# EAGLE board v2 (EAGLE 9.2.0)
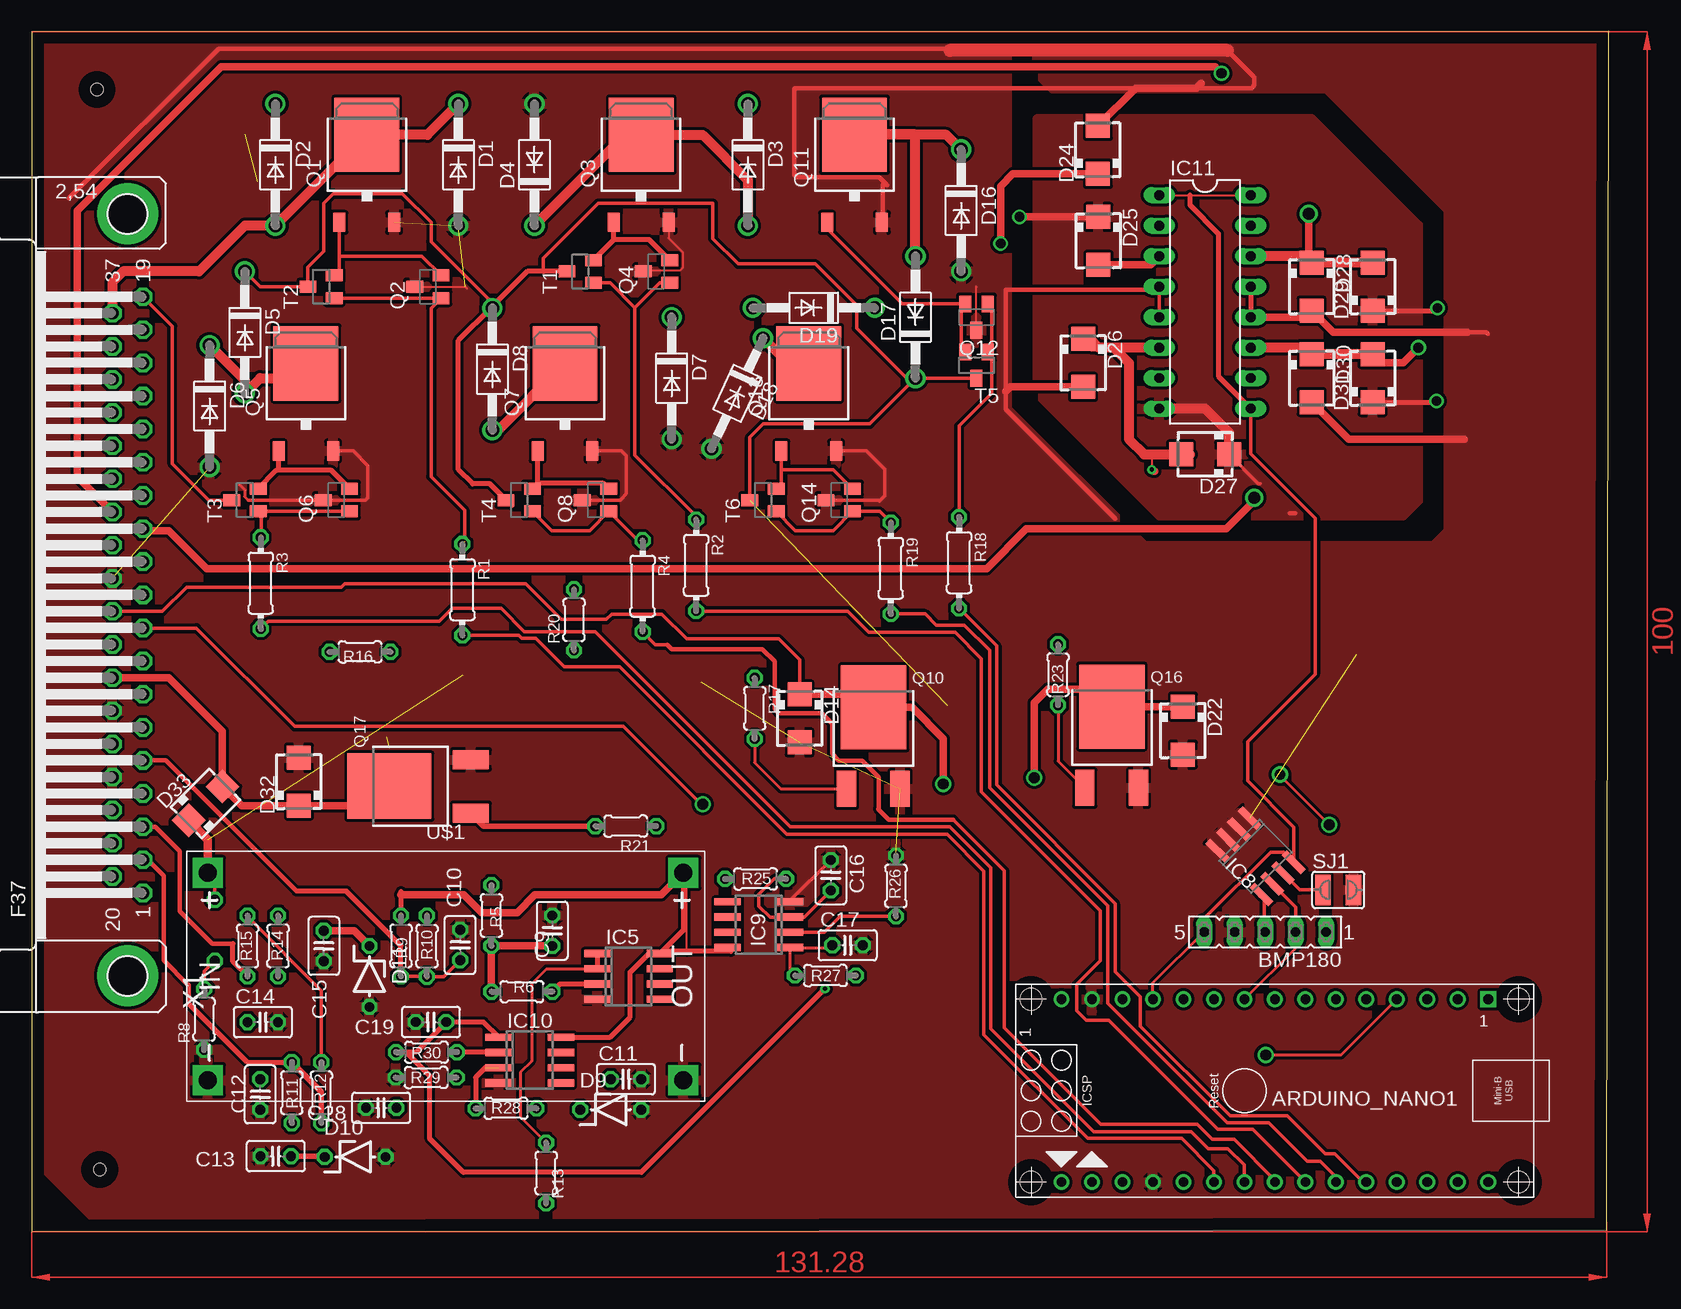
[diagram p0: board, top side]
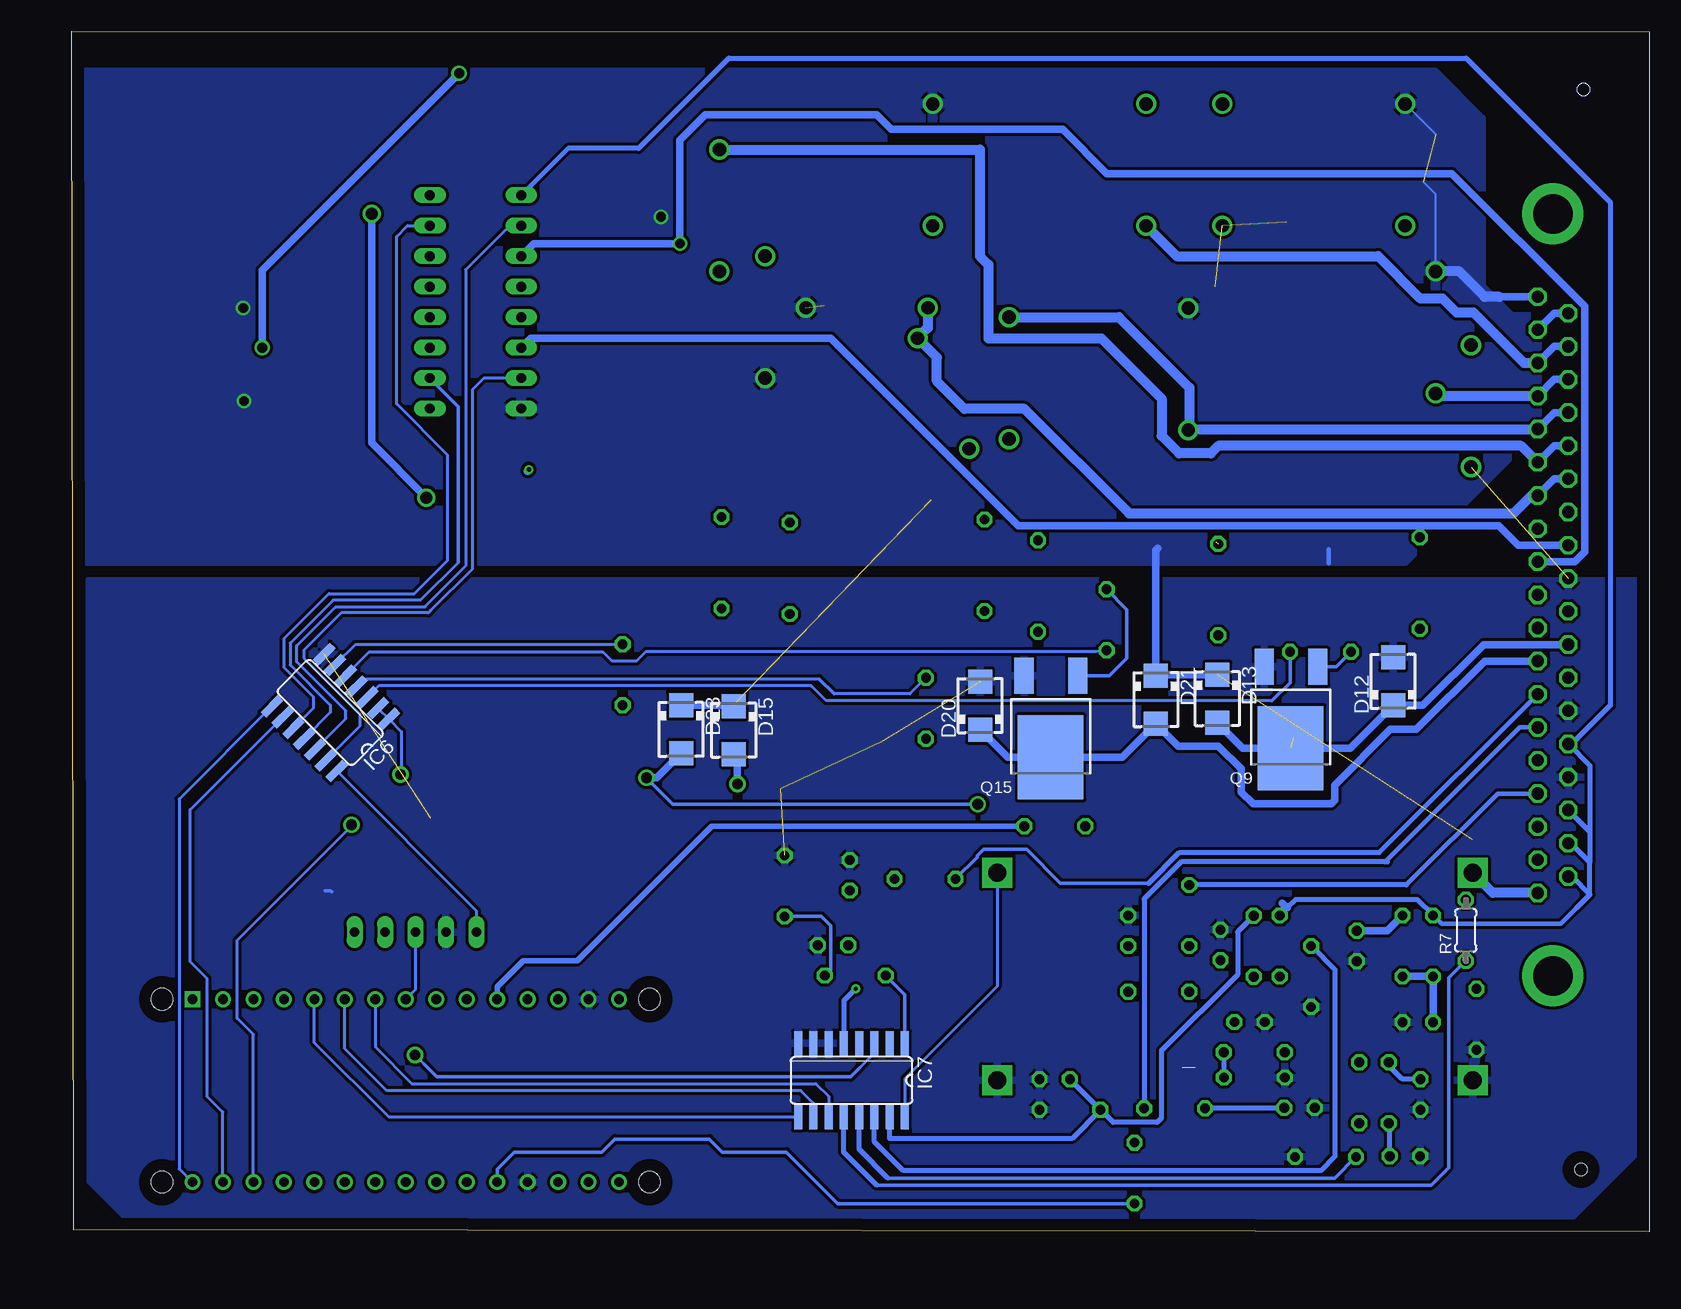
[diagram p1: board, bottom side, seen from below]

Size 131.45 x 100.02 mm. Coordinates in mm from the lower left corner, seen from the top.
Outline: 0,0 131.27,0.16 131.45,100.02 0,100 0,0
Copper layers (1*16): Top 0.035mm / dielectric 1.5mm / Bottom 0.035mm
Design rules "default *": minimum track width 6mil, minimum drill 0.35mm, track to track 10mil, track to pad 10mil, pad to pad 10mil, via to via 10mil, smd to smd 10mil, copper to edge 40mil, drill to drill 6mil, minimum pad ring 10mil, minimum via ring 8mil, stop-mask expansion 4mil, vias tented up to drill 0mil, thermal gap 10mil
Holes 1.02 mm at 5.47,95.16 5.68,5.16

## Footprints (pad centres in the part's own frame; a part is rotated, then mirrored left to right if it is on the bottom)
ARDUINO_NANO = drill 0.8 square: 1 -20.32,-7.62 | drill 0.8: 2 -17.78,-7.62; 3 -15.24,-7.62; 4 -12.7,-7.62; 5 -10.16,-7.62; 6 -7.62,-7.62; 7 -5.08,-7.62; 8 -2.54,-7.62; 9 0,-7.62; 10 2.54,-7.62; 11 5.08,-7.62; 12 7.62,-7.62; 13 10.16,-7.62; 14 12.7,-7.62; 15 15.24,-7.62; 16 15.24,7.62; 17 12.7,7.62; 18 10.16,7.62; 19 7.62,7.62; 20 5.08,7.62; 21 2.54,7.62; 22 0,7.62; 23 -2.54,7.62; 24 -5.08,7.62; 25 -7.62,7.62; 26 -10.16,7.62; 27 -12.7,7.62; 28 -15.24,7.62; 29 -17.78,7.62; 30 -20.32,7.62 | hole 1.778: -22.86,-7.62; -22.86,7.62; 17.78,7.62; 17.78,-7.62
FE05-1 = drill 0.813 long: 1 -5.08,0; 2 -2.54,0; 3 0,0; 4 2.54,0; 5 5.08,0
C025-025X050 = drill 0.813 octagon: 1 -1.27,0; 2 1.27,0
DO41-10 = drill 1.118: A 5.08,0; C -5.08,0
ZDIO-5 = drill 0.813 octagon: A 2.54,0; C -2.54,0
SMA = smd 2 x 2: A 2,0; C -2,0
SO08 = smd 0.6 x 2.2: 1 -1.905,-2.6; 2 -0.635,-2.6; 3 0.635,-2.6; 4 1.905,-2.6; 5 1.905,2.6; 6 0.635,2.6; 7 -0.635,2.6; 8 -1.905,2.6
SO14 = smd 0.66 x 2.032: 1 -3.81,-3.073; 2 -2.54,-3.073; 3 -1.27,-3.073; 4 0,-3.073; 5 1.27,-3.073; 6 2.54,-3.073; 7 3.81,-3.073; 8 3.81,3.073; 9 2.54,3.073; 10 1.27,3.073; 11 0,3.073; 12 -1.27,3.073; 13 -2.54,3.073; 14 -3.81,3.073
SO16 = smd 0.66 x 2.032: 1 -4.445,-3.073; 2 -3.175,-3.073; 3 -1.905,-3.073; 4 -0.635,-3.073; 5 0.635,-3.073; 6 1.905,-3.073; 7 3.175,-3.073; 8 4.445,-3.073; 9 4.445,3.073; 10 3.175,3.073; 11 1.905,3.073; 12 0.635,3.073; 13 -0.635,3.073; 14 -1.905,3.073; 15 -3.175,3.073; 16 -4.445,3.073
SO-08 = smd 0.6 x 2.2: 1 -1.905,-2.6; 2 -0.635,-2.6; 3 0.635,-2.6; 4 1.905,-2.6; 5 1.905,2.6; 6 0.635,2.6; 7 -0.635,2.6; 8 -1.905,2.6
DIL16 = drill 0.813 long: 1 -8.89,-3.81; 2 -6.35,-3.81; 3 -3.81,-3.81; 4 -1.27,-3.81; 5 1.27,-3.81; 6 3.81,-3.81; 7 6.35,-3.81; 8 8.89,-3.81; 9 8.89,3.81; 10 6.35,3.81; 11 3.81,3.81; 12 1.27,3.81; 13 -1.27,3.81; 14 -3.81,3.81; 15 -6.35,3.81; 16 -8.89,3.81
TO252 = smd 1 x 1.6: 1 -2.28,-4.8; 3 2.28,-4.8 | smd 5.4 x 6.2: 2 0,2.5
SOT23-BEC = smd 1 x 1.4: B -0.95,-1.1; C 0,1.1; E 0.95,-1.1
DPAK = smd 1.6 x 2.997: 1 -2.261,-4.928; 3 2.21,-4.928 | smd 5.452 x 7: 4 0,1.853
0204/7 = drill 0.813 octagon: 1 -3.81,0; 2 3.81,0
0204/5 = drill 0.813 octagon: 1 -2.54,0; 2 2.54,0
SJW = smd 1.27 x 2.54: 1 -1.27,0; 2 1.27,0
SOT23 = smd 1 x 1.4: 1 -0.95,-1.1; 2 0.95,-1.1; 3 0,1.1
DC-DC-STEP-DOWN-LM2596 = drill 1.5 pad 2.5 square: IN+ -19.812,8.636; IN- -19.812,-8.636; OUT+ 19.812,8.636; OUT- 19.812,-8.636
F37HP = drill 1.016 octagon: 1 -24.841,-1.27; 2 -22.073,-1.27; 3 -19.329,-1.27; 4 -16.561,-1.27; 5 -13.792,-1.27; 6 -11.049,-1.27; 7 -8.28,-1.27; 8 -5.512,-1.27; 9 -2.769,-1.27; 10 0,-1.27; 11 2.769,-1.27; 12 5.512,-1.27; 13 8.28,-1.27; 14 11.049,-1.27; 15 13.818,-1.27; 16 16.561,-1.27; 17 19.329,-1.27; 18 22.098,-1.27; 19 24.841,-1.27; 20 -23.47,1.27; 21 -20.701,1.27; 22 -17.932,1.27; 23 -15.189,1.27; 24 -12.421,1.27; 25 -9.652,1.27; 26 -6.909,1.27; 27 -4.14,1.27; 28 -1.372,1.27; 29 1.372,1.27; 30 4.14,1.27; 31 6.909,1.27; 32 9.677,1.27; 33 12.421,1.27; 34 15.189,1.27; 35 17.958,1.27; 36 20.701,1.27; 37 23.47,1.27 | drill 3.302 pad 5.08: G1 -31.75,0; G2 31.75,0

## Placement (x,y rotation side)
ARDUINO_NANO1  [ARDUINO_NANO]  101.07,11.74 180 top
BMP180  [FE05-1]  102.8,24.96 180 top
C9  [C025-025X050]  43.4,25.07 90 top
C10  0.001uF  [C025-025X050]  35.71,23.89 90 top
C11  [C025-025X050]  49.53,12.7 0 top
C12  0.001uf  [C025-025X050]  19.05,11.43 270 top
C13  0.1uf  [C025-025X050]  20.35,6.28 180 top
C14  0.001uf  [C025-025X050]  19.27,17.45 0 top
C15  0.1uf  [C025-025X050]  24.35,23.8 270 top
C16  0.001uf  [C025-025X050]  66.61,29.69 90 top
C17  0.22uf  [C025-025X050]  68,23.86 0 top
C18  0.001uf  [C025-025X050]  29.13,10.31 180 top
C19  0.22uf  [C025-025X050]  33.28,17.46 180 top
D1  1N4004  [DO41-10]  35.56,88.9 270 top
D2  1N4004  [DO41-10]  20.32,88.9 270 top
D3  1N4004  [DO41-10]  59.69,88.9 270 top
D4  1N4004  [DO41-10]  41.91,88.9 90 top
D5  1N4004  [DO41-10]  17.78,74.93 270 top
D6  1N4004  [DO41-10]  14.83,68.79 270 top
D7  1N4004  [DO41-10]  53.34,71.12 270 top
D8  1N4004  [DO41-10]  38.4,71.87 270 top
D9  5.1v  [ZDIO-5]  48.26,10.16 0 top
D10  5.1v  [ZDIO-5]  26.96,6.22 0 top
D11  5.1v  [ZDIO-5]  28.16,21.26 270 top
D12  S1M  [SMA]  21.34,45.85 90 bottom
D13  S1M  [SMA]  35.98,44.4 270 bottom
D14  S1M  [SMA]  64,42.76 270 top
D15  S1M  [SMA]  76.27,41.79 270 bottom
D16  1N4004  [DO41-10]  77.47,85.09 270 top
D17  1N4004  [DO41-10]  73.66,76.2 90 top
D18  1N4004  [DO41-10]  58.81,69.84 245 top
D19  1N4004  [DO41-10]  65.18,76.98 180 top
D20  S1M  [SMA]  55.75,43.83 90 bottom
D21  S1M  [SMA]  41.09,44.33 270 bottom
D22  S1M  [SMA]  95.94,41.75 270 top
D23  S1M  [SMA]  80.67,41.84 270 bottom
D24  S1M  [SMA]  88.86,90.14 90 top
D25  S1M  [SMA]  88.9,82.55 270 top
D26  S1M  [SMA]  87.63,72.39 270 top
D27  S1M  [SMA]  97.79,64.77 180 top
D28  S1M  [SMA]  106.68,78.74 270 top
D29  S1M  [SMA]  111.76,78.74 90 top
D30  S1M  [SMA]  106.68,71.12 270 top
D31  S1M  [SMA]  111.76,71.12 90 top
D32  S1M  [SMA]  22.27,37.5 90 top
D33  S1M  [SMA]  14.5,35.67 45 top
IC5  LM358D  [SO08]  49.75,21.26 270 top
IC6  74HC164D  [SO14]  109.89,43.25 135 bottom
IC7  4051D  [SO16]  66.46,12.6 180 bottom
IC8  24AA08SN  [SO-08]  102,31.27 225 top
IC9  LM358D  [SO08]  60.6,25.57 90 top
IC10  LM358D  [SO08]  41.52,14.29 270 top
IC11  L293D  [DIL16]  97.79,77.47 270 top
Q1  Aod442  [TO252]  27.94,88.9 0 top
Q2  BC858ASMD  [SOT23-BEC]  33.02,78.74 90 top
Q3  Aod442  [TO252]  50.8,88.9 0 top
Q4  BC858ASMD  [SOT23-BEC]  52.07,80.01 90 top
Q5  Aod442  [TO252]  22.86,69.85 0 top
Q6  BC858ASMD  [SOT23-BEC]  25.4,60.96 90 top
Q7  Aod442  [TO252]  44.45,69.85 0 top
Q8  BC858ASMD  [SOT23-BEC]  46.99,60.96 90 top
Q9  MJD122  [DPAK]  29.86,42.13 180 bottom
Q10  MJD122  [DPAK]  70.17,41.82 0 top
Q11  Aod442  [TO252]  68.58,88.9 0 top
Q12  BC858ASMD  [SOT23-BEC]  78.74,76.2 180 top
Q13  Aod442  [TO252]  64.77,69.85 0 top
Q14  BC858ASMD  [SOT23-BEC]  67.31,60.96 90 top
Q15  MJD122  [DPAK]  49.87,41.37 180 bottom
Q16  MJD122  [DPAK]  90.03,41.9 0 top
Q17  MJD122  [DPAK]  31.67,37.12 90 top
R1  [0204/7]  35.91,53.49 270 top
R2  [0204/7]  55.38,55.52 270 top
R3  [0204/7]  19.1,54.04 270 top
R4  [0204/7]  50.92,53.79 270 top
R5  2k  [0204/5]  38.32,26.34 270 top
R6  1.5k  [0204/5]  40.86,19.99 0 top
R7  15k  [0204/5]  15.27,25.1 90 bottom
R8  5k  [0204/5]  14.38,17.69 90 top
R9  [0204/5]  32.95,23.78 270 top
R10  [0204/5]  30.78,23.8 270 top
R11  2.2k  [0204/5]  21.68,11.57 270 top
R12  3k  [0204/5]  24.15,11.57 90 top
R13  1.5k  [0204/5]  42.88,4.87 270 top
R14  2.2k  [0204/5]  20.54,23.8 90 top
R15  3k  [0204/5]  18,23.8 90 top
R16  1k  [0204/5]  27.38,48.31 180 top
R17  1k  [0204/5]  60.26,43.6 270 top
R18  [0204/7]  77.29,55.74 270 top
R19  [0204/7]  71.6,55.27 270 top
R20  1k  [0204/5]  45.2,50.98 90 top
R21  1k  [0204/5]  49.52,33.78 180 top
R23  1k  [0204/5]  85.54,46.4 270 top
R25  2k  [0204/5]  60.34,29.39 0 top
R26  1k  [0204/5]  72.04,28.8 90 top
R27  1.5k  [0204/5]  66.15,21.33 180 top
R28  2k  [0204/5]  39.54,10.27 180 top
R29  1k  [0204/5]  32.89,12.83 180 top
R30  1.5k  [0204/5]  32.91,14.94 180 top
SJ1  [SJW]  108.9,28.47 0 top
T1  BC848  [SOT23]  45.72,80.01 90 top
T2  BC848  [SOT23]  24.13,78.74 90 top
T3  BC848  [SOT23]  17.78,60.96 90 top
T4  BC848  [SOT23]  40.64,60.96 90 top
T5  BC848  [SOT23]  78.74,72.2 180 top
T6  BC848  [SOT23]  60.96,60.96 90 top
U$1  DC-DC-STEP-DOWN-LM2596  [DC-DC-STEP-DOWN-LM2596]  34.51,21.26 0 top
X1  [F37HP]  8.01,53.06 90 top

## Library data of the parts
ARDUINO_NANO1 = ArduinoNanoV30
BMP180 = con-lsta; OC_FARNELL: unknown; OC_NEWARK: unknown
C9-C19 = rcl; SPICEPREFIX: C
D1-D33 = diode
IC5 IC9 IC10 = linear
IC6 = 74xx-us
IC7 = 40xx
IC8 = microchip; MF: MICROCHIP; MPN: 24AA08-I/SN; OC_FARNELL: 1579568; OC_NEWARK: 92C6826
IC11 = st-microelectronics
Q1 Q3 Q5 Q7 Q11 Q13 = IGBT
Q2 Q4 Q6 Q8 Q12 Q14 = transistor-pnp
Q9 Q10 Q15-Q17 = MJD122; AVAILABILITY: Unavailable; MF: STMicroelectronics; MP: MJD122; PACKAGE: None; PRICE: None
R1-R21 R23 R25-R30 = rcl; SPICEPREFIX: R
SJ1 = jumper
T1-T6 = transistor
U$1 = diy-modules
X1 = con-subd; OC_FARNELL: unknown; OC_NEWARK: unknown

## Nets
5V: ARDUINO_NANO1.12 BMP180.5 IC5.8 IC6.14 IC7.16 IC8.8 IC9.8 IC10.8 IC11.1 IC11.9 IC11.16 R10.1 R12.2 R15.2 U$1.OUT+ X1.20 X1.21 X1.22 X1.24
A: ARDUINO_NANO1.7 IC7.11
A0: ARDUINO_NANO1.4 IC7.3
ACC: D2.C D3.C D5.C D8.C D13.C D15.C D17.C D19.C D21.C D23.C D25.C D27.C D29.C D31.C D33.C IC11.8 R7.2 T1.3 T2.3 T3.3 T4.3 T5.3 T6.3 U$1.IN+ X1.1 X1.19
AIRIN: C10.1 R9.2 R10.2 X1.5
AIROUT: C11.1 D9.C IC7.15 R9.1
B: ARDUINO_NANO1.6 IC7.10
C: ARDUINO_NANO1.5 IC7.9
CKPIN: R5.1 X1.4
CKPOUT: ARDUINO_NANO1.20 R13.2
CLK1: ARDUINO_NANO1.30 IC6.8
CLR1: ARDUINO_NANO1.29 IC6.9
CPKOUT: IC5.1 IC5.2 R13.1
DATA: ARDUINO_NANO1.28 IC6.1 IC6.2
ECN1: D16.C D17.A Q11.2 X1.14 X1.33
ECN1L: ARDUINO_NANO1.26 R18.2
ECN2: D18.C D19.A Q13.2 X1.13 X1.32
ECN2L: ARDUINO_NANO1.25 R19.2
GND: ARDUINO_NANO1.14 ARDUINO_NANO1.19 BMP180.4 C9.2 C10.2 C11.2 C12.2 C13.2 C14.2 C15.2 C16.2 C17.2 C18.2 C19.2 D1.A D4.A D6.A D7.A D9.A D10.A D11.A D12.A D14.A D16.A D18.A D20.A D22.A D24.A D26.A D28.A D30.A D32.A IC5.4 IC6.7 IC7.6 IC7.7 IC7.8 IC8.1 IC8.2 IC8.3 IC8.4 IC9.4 IC10.4 IC11.4 IC11.5 IC11.12 IC11.13 Q1.3 Q2.C Q3.3 Q4.C Q5.3 Q6.C Q7.3 Q8.C Q9.3 Q10.3 Q11.3 Q12.C Q13.3 Q14.C Q15.3 Q16.3 Q17.3 R8.1 R26.2 R29.2 SJ1.2 U$1.IN- U$1.OUT- X1.23 X1.25 X1.29
IAC_A: D24.C D25.A IC11.3 X1.11
IAC_B: D26.C D27.A IC11.6 X1.30
IAC_C: D28.C D29.A IC11.14 X1.12
IAC_D: D30.C D31.A IC11.11 X1.31
IAC_LA: IC6.12 IC11.2
IAC_LB: IC6.13 IC11.7
IAC_LC: IC6.10 IC11.15
IAC_LD: IC6.11 IC11.10
INY1: D1.C D2.A Q1.2 X1.18 X1.37
INY2: D3.A D4.C Q3.2 X1.17 X1.36
INY3: D5.A D6.C Q5.2 X1.16 X1.35
INY4: D7.C D8.A Q7.2 X1.15 X1.34
INYL1A: ARDUINO_NANO1.21 R1.2
INYL2A: ARDUINO_NANO1.24 R2.2
INYL3A: ARDUINO_NANO1.22 R3.2
INYL4A: ARDUINO_NANO1.23 R4.2
LAMB0: R25.1 X1.7
LAMB0OUT: C17.1 IC7.1 IC9.1 R27.2
LAMB1: R28.1 X1.6
LAMB1OUT: C19.1 IC7.5 IC10.1 R30.2
LED1: X1.10
N$1: C18.1 IC10.3 R28.2
N$2: Q1.1 Q2.E T2.2
N$3: Q2.B R1.1 T2.1
N$4: Q9.1 R16.2
N$5: IC5.3 R6.2
N$6: C9.1 R5.2 R6.1
N$7: Q17.1 R21.2
N$8: Q10.1 R17.2
N$10: Q3.1 Q4.E T1.2
N$11: Q4.B R2.1 T1.1
N$13: Q11.1 Q12.E T5.2
N$15: Q12.B R18.1 T5.1
N$17: Q5.1 Q6.E T3.2
N$18: Q6.B R3.1 T3.1
N$19: Q15.1 R20.2
N$20: Q13.1 Q14.E T6.2
N$22: Q14.B R19.1 T6.1
N$24: Q7.1 Q8.E T4.2
N$25: Q8.B R4.1 T4.1
N$29: Q16.1 R23.2
N$31: C16.1 IC9.3 R25.2
N$32: IC9.2 R26.1 R27.1
N$34: IC8.7 SJ1.1
N$37: IC10.2 R29.1 R30.1
RL1: IC6.3 R16.1
RL1IN: D12.C D13.A Q9.4 X1.27
RL2: IC6.4 R17.1
RL2IN: D14.C D15.A Q10.4 X1.28
RL3: IC6.5 R20.1
RL3IN: D20.C D21.A Q15.4 X1.8
RL4: IC6.6 R23.1
RL4IN: D22.C D23.A Q16.4 X1.9
RL5: ARDUINO_NANO1.11 R21.1
RL5IN: D32.C D33.A Q17.4 X1.26
SCL: ARDUINO_NANO1.9 BMP180.2 IC8.6
SDA: ARDUINO_NANO1.8 BMP180.3 IC8.5
TEMPIN: C14.1 R14.1 R15.1 X1.3
TEMPOUT: C15.1 D11.C IC7.14 R14.2
TPSIN: C12.1 R11.1 R12.1 X1.2
TPSOUT: C13.1 D10.C IC7.13 R11.2
VBAT: IC7.12 R7.1 R8.2
VIN: ARDUINO_NANO1.15

## Tracks (layer width: path | path; a pad name or v marks a point on that pad's centre or on a via)
5V
  Top 0.152: IC11.16 96.52,86.36 IC11.1 | 54.61,23.36 54.61,29.84 U$1.OUT+
  Top 0.254: ARDUINO_NANO1.12 93.45,20.72 97.72,24.99
  Top 0.305: BMP180.5 97.72,24.99 97.72,26.09 103.25,31.62 104.34,31.62 IC8.8 105.18,33.71 101.33,37.56 101.33,40.81 106.96,46.44 106.96,59.45 101.6,64.81 IC11.9 | U$1.OUT+ 54.46,29.89 54.46,29.9 U$1.OUT+ | R12.2 24.15,20.07 18,26.21 R15.2 | 58.3,23.36 58.3,23.67
  Top 0.406: IC5.8 54.29,25.11 54.29,29.31 | U$1.OUT+ | 58.3,23.67 IC9.8 | 58.3,23.36 54.61,23.36 52.54,23.36 IC5.8 | IC10.8 48.22,16.19 49.89,17.87 49.89,21.62 51.44,23.17 IC5.8 | 96.52,86.36 96.52,85.55 98.9,83.17 98.9,71.28 IC11.9 | 30.78,28.32 30.78,28.07 R10.1
  Top 0.61: 30.78,28.07 36,28.07 37.5,26.57 40.46,26.57 41.94,28.05 52.48,28.05 U$1.OUT+
  Bottom 0.254: IC6.14 97.72,26.73 BMP180.5 | U$1.OUT+ 54.32,20.44 62.02,12.75 IC7.16
  Bottom 0.356: 90.08,90.26 IC11.1 | 6.08,26.93 7.38,25.63 17.29,25.63 R15.2
  Bottom 0.406: 17.89,26.23 R15.2 19.33,27.67 29.45,27.67 30.15,26.97 R10.1 | 4.93,28.07 6.08,26.93 | 4.93,28.07 4.93,30.79 | 4.93,30.79 6.51,32.36 X1.21 | X1.22 4.93,33.32 | 4.93,33.32 4.93,30.79 | 4.93,33.32 4.93,38.83 X1.24 6.44,40.64 3.22,43.85 3.22,85.77 15.24,97.79 76.68,97.79 84.21,90.26 90.08,90.26 | X1.20 6.45,29.59 4.93,28.07
  Bottom 0.61: 30.15,26.97 | 30.15,26.97 30.55,27.37
A
  Bottom 0.254: IC7.11 68.37,11.27 69.43,12.33 103.09,12.33 106.15,15.39 ARDUINO_NANO1.7
A0  (via drill 0.9)
  Top 0.254: v102.84,14.72 109.13,14.72 ARDUINO_NANO1.4
  Bottom 0.254: IC7.3 64.56,14.88 65.78,13.66 | 102.06,13.94 v102.84,14.72
  Bottom 0.305: 65.78,13.66 66.54,12.9 101.02,12.9 102.06,13.94
  Bottom 0.406: 64.57,15.69 IC7.3
ACC  (via drill 0.8)  (4 unrouted)
  Top 0.305: D5.C 19.05,78.74 T2.3 23.03,80.37 24.37,81.71 24.37,85.71 25.16,86.5 30.91,86.5 33.3,84.1 33.3,82.49 38.4,77.39 D8.C | T6.3 59.86,66.21 60.96,67.31 69.85,67.31 D17.C | T5.3 78.72,71.12 D17.C | R7.2 15.27,29.32 U$1.IN+ | 102.37,62.33 102.23,62.33 D27.C | T4.3 40.06,60.44 | T3.3 14.76,60.96 11.74,63.98 11.74,75.44 X1.19 | 42.64,80.01 42.64,81.11 47.2,85.67 56.77,85.67 56.77,82.75 58.88,80.64 65.3,80.64 68.75,77.19 68.75,75.3 72.92,71.12 D17.C | 105.02,59.86 105.06,59.86
  Top 0.356: 104.84,59.86 105.02,59.86 | 105.06,59.86 105.29,59.86
  Top 0.406: T1.3 42.64,80.01 41.31,80.01 38.4,77.1 D8.C 38.25,76.95 35.56,74.26 35.56,63.5 36.74,62.31 38.19,62.31 T4.3 | 16.51,60.96 T3.3 | D29.C 116.93,76.74 v117.15,76.96 | D31.C 117,69.12 v117.09,69.2
  Top 0.61: D25.C 82.35,84.55 v82.34,84.56
  Top 0.711: D33.C 14.7,32.64 U$1.IN+
  Top 0.813: D27.C 99.79,66.58 97.79,68.58 IC11.8
  Bottom 0.152: 17.78,91.44 D2.C | D5.C 17.78,86.44 18.82,87.47
  Bottom 0.356: 26.7,55.68 26.7,56.86
  Bottom 0.61: v82.34,84.56 82.34,84.4 82.3,84.36 | X1.19 12.47,77.9 | D21.C 41.09,46.42 | 41.09,46.42 41.09,56.77 40.93,56.93 | D13.C 41.07,46.4 41.09,46.42 | D23.C 76.32,43.84 D15.C
  Bottom 0.813: U$1.IN+ 13.02,28.22 X1.1 | 12.47,77.9 13.69,77.9 15.8,80.01 D5.C
  pour Bottom: 6.35,76.2 11.43,76.2 13.97,78.74 13.97,92.71 17.83,96.57 160.12,96.57 200.81,55.88 20.32,55.88 6.35,69.85
  pour Top: 83.82,92.71 83.82,69.85 93.98,59.69 114.3,59.69 115.57,60.96 115.57,83.82 106.68,92.71
AIRIN
  Top 0.305: R10.2 32.93,21.26 R9.2 34.34,21.24 C10.1
  Top 0.356: 22.1,28.37 11.2,39.27 X1.5
  Top 0.406: R10.2 30.78,23.82 26.24,28.37 22.1,28.37
AIROUT
  Bottom 0.406: R9.1 34.29,24.98 34.29,21.42 40.64,15.07 40.64,9.45 40.99,9.1 44.66,9.1 45.65,10.09 | 45.65,10.09 D9.C C11.1 | 45.65,10.09 45.74,10.09 48.08,7.75 63.29,7.75 IC7.15
B
  Bottom 0.254: IC7.10 69.64,10.71 70.67,11.74 105.2,11.74 108.69,15.22 ARDUINO_NANO1.6
  Bottom 0.305: IC7.10 69.58,9.58
C
  Bottom 0.254: IC7.9 105,9.53 111.23,15.75 ARDUINO_NANO1.5
CKPIN
  Bottom 0.356: 20.21,28.88 12.6,36.5 X1.4
  Bottom 0.406: 20.21,28.88 R5.1
CKPOUT
  Bottom 0.305: R13.2 67.61,2.33 71.89,6.62 77.22,6.62 78.3,7.7 86.19,7.7 87.27,6.62 94.56,6.62 95.99,5.19 ARDUINO_NANO1.20
CLK1
  Bottom 0.254: IC6.8 122.49,36.03 122.49,5.22 ARDUINO_NANO1.30
CLR1
  Bottom 0.254: ARDUINO_NANO1.29 118.85,9.94 120.15,11.25 120.15,21.08 121.57,22.5 121.57,35.16 IC6.9
CPKOUT
  Top 0.254: IC5.2 42.93,21.9 41.67,20.64 41.67,14.21 40.74,13.28 40.74,9.55 R13.1
  Top 0.406: IC5.1 IC5.2
DATA  (via drill 0.9)
  Top 0.254: v108.13,33.9 104.04,37.99 v104.04,38.09
  Bottom 0.254: IC6.2 IC6.1 103.96,41.67 103.96,38.17 v104.04,38.09 | v108.13,33.9 108.02,33.9 117.65,24.27 117.65,17.77 116.31,16.43 ARDUINO_NANO1.28
ECN1
  Top 0.813: D16.C 76.24,91.4 73.66,91.4 | 73.66,91.4 Q11.2 68.62,91.44 73.66,91.44 73.66,91.4 | D17.A 73.66,91.4
  Bottom 0.61: X1.33 7.91,65.48 X1.14
  Bottom 0.813: D16.C 55.77,90.17 55.77,81.28 55.06,80.57 55.06,74.43 45.65,74.43 40.63,69.41 40.63,66.3 39.17,64.84 36.52,64.84 35.88,65.48 10.65,65.48 X1.14
ECN1L
  Top 0.305: R18.2 80.41,48.81 80.41,37.24 90.23,27.42 90.23,27.39 90.29,27.34 90.29,21.64 92.38,19.55 92.38,17.13 99.87,9.63 104.65,9.63 107.81,6.47 108.61,6.47 110.96,4.12 ARDUINO_NANO1.26
ECN2
  Top 0.813: D18.C 63.05,72.35 Q13.2
  Bottom 0.61: X1.32 7.88,62.74 X1.13
  Bottom 0.813: X1.13 9.78,61.34 11.28,59.84 43.33,59.84 52.05,68.56 57.05,68.56 59.35,70.86 59.35,72.84 D18.C 60.1,75.3 D19.A
ECN2L
  Top 0.305: R19.2 74.46,51.46 75.38,50.54 77.74,50.54 79.84,48.44 79.84,36.99 89.68,27.16 89.68,19.04 99.64,9.07 103.12,9.07 106.32,5.87 107.38,5.87 108.69,4.56 ARDUINO_NANO1.25
GND  (7 unrouted)
  Top 0.152: Q12.C 78.74,78.72 78.71,78.75 | Q3.3 53.08,82.79 54.25,81.62 54.25,80.3 54.03,80.08 51.7,80.08 51.53,79.9 51.08,79.9 Q4.C | Q2.C 36.14,78.74 36.27,78.61
  Top 0.254: 18.05,60.96 17.77,61.25 17.77,61.81 17.34,62.23
  Top 0.305: Q8.C 49.04,60.96 49.56,61.48 49.56,64.64 49.16,65.05 Q7.3 | Q5.3 26.8,65.05 28.03,63.82 28.03,61.15 27.84,60.96 Q6.C 18.05,60.96 | 93.71,78.47 IC11.4 IC11.5 | IC9.4 63.2,27.55 C16.2 | Q14.C 70.53,60.96 70.64,60.85 71.09,61.3 71.09,63.54 69.58,65.05 Q13.3
  Top 0.356: D30.A 107.06,68.74 | 94.03,95.28 101.68,95.28 101.91,95.51 101.91,96.17 99.65,98.43 | 76.52,98.43 76.38,98.58 15.6,98.58 3.12,86.1 | 101.04,76.35 101.45,76.35 IC11.12 | 93.71,78.47 81.17,78.47 81.17,68.55 90.29,59.42 | 119.64,74.93 121.23,74.93 121.33,74.83 | 92,95.28 63.61,95.28 63.58,95.25 63.58,88.02 63.72,87.87 70.63,87.87 71.25,87.25 | 71.31,87.19 71.25,87.25 | 71.25,87.25 70.93,87.25 70.93,84.17 Q11.3
  Top 0.406: IC11.13 IC11.12
  Top 0.61: 107.06,68.74 109.76,66.04 119.38,66.04 | 106.14,76.2 IC11.12 | D28.A 108.49,74.93 119.64,74.93 | D24.A 92,95.28 94.03,95.28 97.07,95.28 97.48,95.7 | D26.A 81.55,70.39 81.19,70.03
  Top 0.813: D28.A 106.14,76.2
  Top 1.067: 99.65,98.43 76.52,98.43
  Bottom 0.305: 110.32,28.42 109.88,28.42 109.78,28.32
  pour Top: 0,99.06 81.28,99.06 81.28,68.58 92.71,57.15 116.84,57.15 118.11,58.42 118.11,85.09 107.95,95.25 85.09,95.25 83.82,96.52 83.82,99.06 156.65,99.06 158.75,96.96 158.75,3.81 155.5,0.56 5.79,0.56 1.27,5.08 1.27,97.79
  pour Bottom: 0.24,54.23 130.08,54.23 130.08,4.35 121.64,-4.09 11.71,-4.09 1.27,6.35 1.27,53.19
IAC_A  (via drill 0.8)
  Top 0.61: D24.C 81.78,88.14 80.75,87.11 80.75,82.35 v80.76,82.33 | D25.A 93.25,80.55 IC11.3
  Bottom 0.61: X1.11 6.17,55.83 5.37,56.63 5.37,77.1 16.43,88.16 45.18,88.16 48.87,91.85 63.13,91.85 64.37,93.08 78.63,93.08 80.76,90.95 v80.76,82.33 92.93,82.33 IC11.3
IAC_B  (via drill 0.35)
  Top 0.152: 93.47,63.34 v93.34,63.5 93.34,64.77
  Top 0.61: 90.17,73.66 88.36,73.66 D26.C | 93.61,63.34 93.47,63.34 | 95.04,64.77 D27.A
  Top 0.813: D26.C 88.17,74.39 88.9,73.66 90.17,73.66 | IC11.6 90.17,73.66 | 96.52,64.77 D27.A 93.34,64.77 92.71,64.77 91.44,66.04 91.44,72.39 90.17,73.66
  Bottom 0.152: v93.34,63.5 93.4,63.34
  Bottom 0.61: 93.47,63.34 93.4,63.34 | X1.30 10.88,57.2 12.51,58.83 52.56,58.83 68.17,74.45 93.19,74.45 IC11.6
IAC_C  (via drill 1)
  Top 0.61: X1.12 9.43,58.42 11.42,58.42 14.6,55.24 79.58,55.24 82.91,58.57 99.55,58.57 101.76,60.78 101.76,61.04 v101.89,61.17 | v106.45,84.8 106.45,80.97 D28.C
  Top 0.813: IC11.14 106.14,81.28 D28.C D29.A
  Bottom 0.61: v101.89,61.17 106.45,65.73 v106.45,84.8
IAC_D  (via drill 0.85)
  Top 0.61: X1.31 3.81,62.9 3.81,85.06 15.8,97.05 98.65,97.05 98.83,96.88 98.83,96.85 v99.16,96.52 | v115.57,73.66 114.3,72.39 112.49,72.39 D31.A
  Top 0.813: D31.A D30.C 106.14,73.66 IC11.11
  Bottom 0.61: v99.16,96.52 115.57,80.11 v115.57,73.66
IAC_LA
  Bottom 0.254: IC11.2 94.95,83.82 98.62,80.15 98.62,55.47 102.02,52.06 109.46,52.06 112.69,48.83 112.69,47.48 108.6,43.38 108.6,42.74 IC6.12
IAC_LB
  Bottom 0.254: IC11.7 97.11,71.12 98.06,70.16 98.06,55.21 101.51,51.76 101.64,51.62 101.72,51.55 109,51.55 112.1,48.45 112.1,47.78 107.43,43.12 107.43,42.12 IC6.13
IAC_LC
  Bottom 0.254: IC11.15 103.47,83.82 104.38,82.91 104.38,68.97 100.11,64.7 100.11,55.93 102.89,53.15 110.01,53.15 113.75,49.41 113.75,47.01 111.29,44.54 111.29,43.65 IC6.10 | IC11.15
IAC_LD
  Bottom 0.254: 99.22,55.79 99.21,55.79 102.38,52.62 109.66,52.62 113.23,49.05 113.23,47.22 109.88,43.87 109.88,43.26 IC6.11
  Bottom 0.305: IC11.10 99.22,68.74 99.22,55.79
INY1
  Top 0.813: D1.C 32.98,91.4 Q1.2 27.9,91.4 D2.A 17.78,83.82 13.97,80.01 7.62,80.01 6.74,79.13 X1.37
  Bottom 0.61: X1.37 7.91,76.53 X1.18
INY2
  Top 0.813: D4.C 49.49,91.4 Q3.2 55.92,91.4 59.69,87.63 D3.A
  Bottom 0.61: X1.36 7.91,73.76 X1.17
  Bottom 0.813: D4.C 39.37,81.28 22.58,81.28 19.05,77.74 17.21,77.74 16.06,76.6 14.64,76.6 10.42,72.39 X1.17
INY3
  Top 0.813: 21.63,71.12 24.13,71.12 | Q5.2 21.63,71.12 | 21.63,71.12 19.05,71.12 D5.A | 17.55,69.62 D5.A | D6.C 17.78,70.92 D5.A
  Bottom 0.61: X1.35 7.88,71.02 X1.16
  Bottom 0.813: X1.16 17.55,69.62 D5.A
INY4
  Top 0.813: 45.72,73.62 Q7.2 | D8.A 38.89,66.79 Q7.2 | 43.18,72.39 44.41,72.39 Q7.2
  Bottom 0.61: X1.34 7.91,68.25 X1.15
  Bottom 0.813: X1.15 38.31,66.88 D8.A 38.3,66.89 38.3,70.32 44.19,76.2 D7.C
INYL1A
  Top 0.305: R1.2 40.59,49.69 40.84,49.43 42.03,49.43 44.4,47.07 49,47.07 62.95,33.12 76.29,33.12 79.37,30.04 79.37,16.41 88,7.78 88.27,7.78 88.28,7.77 95.84,7.77 98.53,5.09 ARDUINO_NANO1.21
INYL2A
  Top 0.305: R2.2 68.03,51.71 69.79,49.95 76.96,49.95 79.16,47.75 79.16,36.66 89.07,26.75 89.07,22.57 87.1,20.6 87.1,18.41 87.9,17.61 89.76,17.61 98.84,8.52 99.4,8.52 99.41,8.52 101.77,8.52 106.15,4.13 106.16,4.13 ARDUINO_NANO1.24
INYL3A
  Top 0.305: R3.2 19.73,50.85 33.96,50.85 35.04,51.93 39.13,51.93 41.07,49.99 46.97,49.99 63.23,33.73 76.51,33.73 79.93,30.31 79.93,16.91 88.51,8.33 96.66,8.33 98.06,6.92 99.7,6.92 101.07,5.55 ARDUINO_NANO1.22
INYL4A
  Top 0.305: R4.2 51.99,48.91 52.98,48.91 | 76.8,34.32 81.06,30.06 81.06,16.97 89.08,8.94 97.14,8.94 98.39,7.7 100.2,7.7 103.61,4.29 ARDUINO_NANO1.23
  Top 0.356: 52.98,48.91 53.35,48.54 60.9,48.54 61.91,47.52 61.91,43.55 62.26,43.2 65.85,43.2 66.73,42.32 66.73,39.8 67.28,39.25 69.21,39.25 70.59,37.87 70.59,35.16 | 70.59,35.16 70.54,35.22 | 70.59,35.16 71.44,34.32 76.8,34.32
LAMB0
  Bottom 0.305: 41.7,29.02 49.05,29.02 51.87,31.85 55.44,31.85 55.98,31.32 55.98,31.21 R25.1
  Bottom 0.356: 22.46,31.6 X1.7
  Bottom 0.406: 22.46,31.6 39.13,31.6 41.7,29.02
LAMB0OUT
  Top 0.254: R27.2 63.2,21.74 IC9.1 66.54,23.67 C17.1
  Bottom 0.305: R27.2 62.02,19.74 IC7.1
LAMB1
  Bottom 0.356: 21.98,30.81 10.79,42.01 X1.6
  Bottom 0.406: 21.79,30.81 21.98,30.81 38.98,30.81 42.08,27.72 R28.1
LAMB1OUT  (via drill 0.35)
  Top 0.406: IC10.1 37.65,17.46 C19.1 32.04,14.94 31.23,14.94 | 31.23,14.94 R30.2 | 31.23,14.94 33.19,12.98 33.19,7.72 35.98,4.93 50.82,4.93 v66.12,20.23
  Bottom 0.406: v66.12,20.23 67.1,19.25 IC7.5
LED1
  Bottom 0.305: 9.43,52.91 X1.10
N$1  (1 unrouted)
  Top 0.406: 37.8,13.65 37,12.86 R28.2
  Bottom 0.406: 36.98,10.26 R28.2 30.44,10.27 C18.1
N$2
  Top 0.305: Q1.1 25.66,81.28 | 25.66,81.28 25.66,80.12 T2.2 | Q2.E 32.53,81.28 25.66,81.28
N$3  (1 unrouted)
  Top 0.305: T2.1 Q2.B 33.29,76.96 33.29,62.9 36.09,60.1 36.09,57.49
N$4
  Bottom 0.305: R16.2 26.09,47.06 Q9.1
N$5
  Top 0.406: IC5.3 44.04,20.63 R6.2
N$6
  Top 0.61: R6.1 R5.2 C9.1
N$7
  Top 0.457: Q17.1 37.67,33.78 R21.2
N$8
  Top 0.254: R17.2 60.26,39.08 62.45,36.89 Q10.1
N$10
  Top 0.406: 48.26,84.1 Q3.1 48.52,82.66 | Q4.E 51.47,82.66 48.52,82.66 | T1.2 48.52,82.66
N$11
  Top 0.305: Q4.B 52.33,79.06 50.28,77 | 50.28,77 50.28,64.71 55.38,59.6 R2.1 | T1.1 48.22,79.06 50.28,77
  Top 0.406: 46.88,79 T1.1 46.82,78.91
N$13
  Top 0.305: T5.2 77.79,73.34 77.47,73.66 77.47,76.98 Q12.E 72.56,77.3 66.3,83.56 Q11.1
N$15
  Top 0.152: 80.01,77.47 Q12.B
  Top 0.305: 80.01,73.62 T5.1 | 80.01,73.62 80.01,77.47 | R18.1 77.29,67.13 80.01,69.85 80.01,73.62
N$17
  Top 0.406: T3.2 20.39,63.42 | 20.39,63.42 20.58,63.61 Q5.1 | Q6.E 24.98,63.42 20.39,63.42
N$18
  Top 0.305: 19.12,59.77 T3.1 26.35,60.01 26.5,59.86 | 19.12,59.77 19.14,59.75 19.2,59.69 | 26.5,59.86 26.67,59.69 | R3.1 19.12,57.88 19.12,59.77 | Q6.B 26.5,59.86
  Top 0.61: 19.41,60.01 19.14,59.75
N$19
  Bottom 0.305: Q15.1 44.99,46.3 43.5,47.79 43.5,51.82 R20.2
N$20
  Top 0.305: Q13.1 62.49,63.5 | 62.49,63.5 62.49,62.34 T6.2 | Q14.E 66.82,63.5 62.49,63.5
N$22
  Top 0.305: T6.1 63.65,58.42 66.82,58.42 Q14.B 70.68,60.01 R19.1
N$24
  Top 0.406: T4.2 42.17,62.34 | 42.17,62.34 Q7.1 | Q8.E 47.66,62.34 42.17,62.34
N$25
  Top 0.305: R4.1 50.5,57.6 Q8.B 46.5,58.42 43.33,58.42 T4.1
N$29
  Top 0.254: R23.2 85.54,39.2 Q16.1
N$31
  Top 0.254: 66.59,28.4 C16.1
  Top 0.305: R25.2 61.89,29.39 60.62,28.11 60.62,27.13 61.54,26.21 IC9.3 64.39,26.21 66.59,28.4
N$32
  Top 0.305: IC9.2 66.06,24.94 67.38,26.26 R26.1
  Bottom 0.305: R26.1 68.96,26.26 68.21,25.5 68.21,21.82 R27.1
N$34
  Top 0.305: IC8.7 105.69,28.47 SJ1.1
N$37
  Top 0.406: IC10.2 35.47,14.92 R30.1
  Bottom 0.406: R29.1 35.45,12.85 R30.1
RL1
  Bottom 0.254: IC6.3 105.87,45.48 69.82,45.48 68.58,44.24 31.43,44.24
  Bottom 0.305: R16.1 29.92,45.75 31.43,44.24
RL1IN  (1 unrouted)
  Bottom 0.61: 29.58,41.25 | D13.A 33.85,40.28 Q9.4 | 28.16,37.92 29.86,39.62 29.86,39.86 | 29.86,39.86 Q9.4 | X1.27 13.79,48.92 18.85,43.85 D12.C 24.91,40.28 Q9.4 | 29.75,39.75 29.86,39.86
RL2
  Bottom 0.254: R17.1 61.6,44.8 67.92,44.8 | 69.15,46.04 107.1,46.04 IC6.4
  Bottom 0.305: 67.92,44.8 69.15,46.04
RL2IN  (via drill 0.9)
  Top 0.305: D14.C 64,47.66 62.26,49.4 54.58,49.4 52.53,51.45 48.33,51.45 47.9,51.02 44.13,51.02 41.17,53.98 26.1,53.98 25.83,53.7 12.92,53.7 10.9,51.69 X1.28
  Top 0.61: D14.C 70.08,44.76 70.67,44.17 Q10.4 73.37,43.67 75.97,41.08 v75.97,37.29
  Bottom 0.61: D15.A 75.97,39.49 v75.97,37.29
RL3
  Bottom 0.152: 108.34,46.6 IC6.5
  Bottom 0.254: R20.1 46.05,48.32 83.6,48.32 84.39,47.54 86.42,47.54 87.14,48.26 106.68,48.26 108.34,46.6
RL3IN
  Bottom 0.61: 50.5,39.44 Q15.4 | Q15.4 43.9,39.52 D21.A 39.22,40.46 35.88,40.46 33.97,38.55 33.97,36.61 33,35.64 26.5,35.64 26.2,35.94 26.2,37.21 21.57,41.84 19.4,41.84 13.7,47.55 X1.8 | D20.C 53.44,39.52 Q15.4
RL4
  Bottom 0.254: R23.1 107.79,48.94 IC6.6
RL4IN  (via drill 0.9)
  Top 0.305: X1.9 13.72,50.29 21.92,42.09 49.32,42.09 55.87,35.55 v55.93,35.61 | v55.93,35.61 | 83.68,44.2 83.55,44.07
  Top 0.61: D22.C Q16.4 88.58,45.21 84.69,45.21 83.68,44.2 | 83.55,44.07 v83.55,37.82
  Bottom 0.305: v83.55,37.82 81.34,35.61 v55.93,35.61
  Bottom 0.61: D23.A 82.68,37.82 v83.55,37.82
RL5
  Bottom 0.457: R21.1 78.11,33.78 89.33,22.57 93.83,22.57 95.99,20.41 ARDUINO_NANO1.11
RL5IN
  Top 0.61: X1.26 11.45,46.15 15.91,41.69 D33.A 17.5,35.5 D32.C | 21.98,35.5 D32.C | D32.C 22.43,35.5 28.21,35.5 Q17.4
SCL
  Top 0.254: ARDUINO_NANO1.9 105.34,23.63 105.34,25.32
  Top 0.305: IC8.6 105.34,27.03 105.34,25.32 BMP180.2
SDA
  Top 0.305: 102.72,27.85 102.72,25.03 BMP180.3
  Top 0.61: 102.72,27.85 IC8.5
  Bottom 0.254: BMP180.3 102.8,20.17 ARDUINO_NANO1.8
TEMPIN
  Top 0.356: 16.77,24 15.07,24 12.36,26.71 12.36,31.67 10.3,33.73 X1.3
  Top 0.406: 16.77,24 16.77,22.49 R15.1
  Bottom 0.61: C14.1 R15.1 R14.1
TEMPOUT
  Top 0.61: C15.1 26.89,25.07 D11.C
  Bottom 0.406: D11.C 26.18,21.82 26.18,6.25 27.35,5.09 62.14,5.09 64.56,7.5 IC7.14
  Bottom 0.61: R14.2 21.81,25.07 C15.1
TPSIN
  Top 0.356: X1.2 9.68,30.99 11,29.66 11,22.59 13.06,20.53
  Top 0.406: R11.1 17.99,14.11 13.06,19.04 13.06,20.53
  Top 0.457: R11.1 24.15,11.65 R12.1
  Bottom 0.406: R11.1 21.98,14.11 20.57,12.7 C12.1
TPSOUT
  Top 0.457: D10.C 24.36,6.28 C13.1
  Bottom 0.305: D10.C 26.19,4.46 63.42,4.46
  Bottom 0.406: 21.49,6.16 C13.1 21.62,8.96 R11.2 | 63.42,4.46 65.83,6.86 IC7.13
VBAT
  Top 0.305: R7.1 14.38,21.68 R8.2
  Bottom 0.305: R7.1 16.69,21.14 16.69,5.33 18.16,3.86 64.35,3.86 | IC7.12 67.1,9.64 67.13,9.64
  Bottom 0.406: 64.35,3.86 67.13,6.64 67.13,9.64
(copper drawn outside any net)
  shapes: Top area x2